# EAGLE board TLC5955_Breakout (EAGLE 7.5.0)

Size 100 x 80 mm. Coordinates in mm from the lower left corner, seen from the top.
Outline: 0,0 100,0 100,80 0,80 0,0
Copper layers (1*16): Top 0.035mm / dielectric 1.5mm / Bottom 0.035mm
Design rules "default": minimum track width 10mil, minimum drill 24mil, track to track 8mil, track to pad 8mil, pad to pad 8mil, via to via 8mil, smd to smd 8mil, copper to edge 40mil, drill to drill 8mil, minimum pad ring 10mil, minimum via ring 8mil, stop-mask expansion 4mil, vias tented up to drill 0mil, thermal gap 10mil

## Footprints (pad centres in the part's own frame; a part is rotated, then mirrored left to right if it is on the bottom)
56-HTSSOP = smd 0.3 x 1.55: P1 -7,-3.8; P2 -6.5,-3.8; P3 -6,-3.8; P4 -5.5,-3.8; P5 -5,-3.8; P6 -4.5,-3.8; P7 -4,-3.8; P8 -3.5,-3.8; P9 -3,-3.8; P10 -2.5,-3.8; P11 -2,-3.8; P12 -1.5,-3.8; P13 -1,-3.8; P14 -0.5,-3.8; P15 0,-3.8; P16 0.5,-3.8; P17 1,-3.8; P18 1.5,-3.8; P19 2,-3.8; P20 2.5,-3.8; P21 3,-3.8; P22 3.5,-3.8; P23 4,-3.8; P24 4.5,-3.8; P25 5,-3.8; P26 5.5,-3.8; P27 6,-3.8; P28 6.5,-3.8; P29 6.5,3.75; P30 6,3.75; P31 5.5,3.75; P32 5,3.75; P33 4.5,3.75; P34 4,3.75; P35 3.5,3.75; P36 3,3.75; P37 2.5,3.75; P38 2,3.75; P39 1.5,3.75; P40 1,3.75; P41 0.5,3.75; P42 0,3.75; P43 -0.5,3.75; P44 -1,3.75; P45 -1.5,3.75; P46 -2,3.75; P47 -2.5,3.75; P48 -3,3.75; P49 -3.5,3.75; P50 -4,3.75; P51 -4.5,3.75; P52 -5,3.75; P53 -5.5,3.75; P54 -6,3.75; P55 -6.5,3.75; P56 -7,3.75 | smd 1.27 x 0.635: P$1 0,0
28PIN_HOLES = drill 1.016 pad 1.778 long: P1 -34.29,0; P2 -31.75,0; P3 -29.21,0; P4 -26.67,0; P5 -24.13,0; P6 -21.59,0; P7 -19.05,0; P8 -16.51,0; P9 -13.97,0; P10 -11.43,0; P11 -8.89,0; P12 -6.35,0; P13 -3.81,0; P14 -1.27,0; P15 1.27,0; P16 3.81,0; P17 6.35,0; P18 8.89,0; P19 11.43,0; P20 13.97,0; P21 16.51,0; P22 19.05,0; P23 21.59,0; P24 24.13,0; P25 26.67,0; P26 29.21,0; P27 31.75,0; P28 34.29,0

## Placement (x,y rotation side)
U$1  TLC5955V0  [56-HTSSOP]  38.1,12.7 0 top
U$2  28_PINS0  [28PIN_HOLES]  38.1,3.81 0 top
U$3  28_PINS0  [28PIN_HOLES]  39.37,22.86 0 top

## Library data of the parts
U$1-U$3 = WallerLabLib

## Nets
N$1: U$1.P55 U$3.P2
N$2: U$1.P54 U$3.P3
N$3: U$1.P56 U$3.P1
N$4: U$1.P53 U$3.P4
N$5: U$1.P51
N$6: U$1.P52 U$3.P6

## Tracks (layer width: path | path; a pad name or v marks a point on that pad's centre or on a via)
N$1  (1 unrouted)
N$2  (1 unrouted)
N$3  (1 unrouted)
N$4  (1 unrouted)
N$6  (1 unrouted)